# Altium PCB FRONT.PcbDoc (part 4 of 5)
Units mm, origin at the board's own origin, x right, y up, seen from the top; angles counter-clockwise.
Board outline 100 x 68 mm, 4 copper layers (Top Layer, Layer 1, Layer 2, Bottom Layer), stack 1.484 mm thick; 322 components, 276 nets, 1438 pads, 1119 vias.
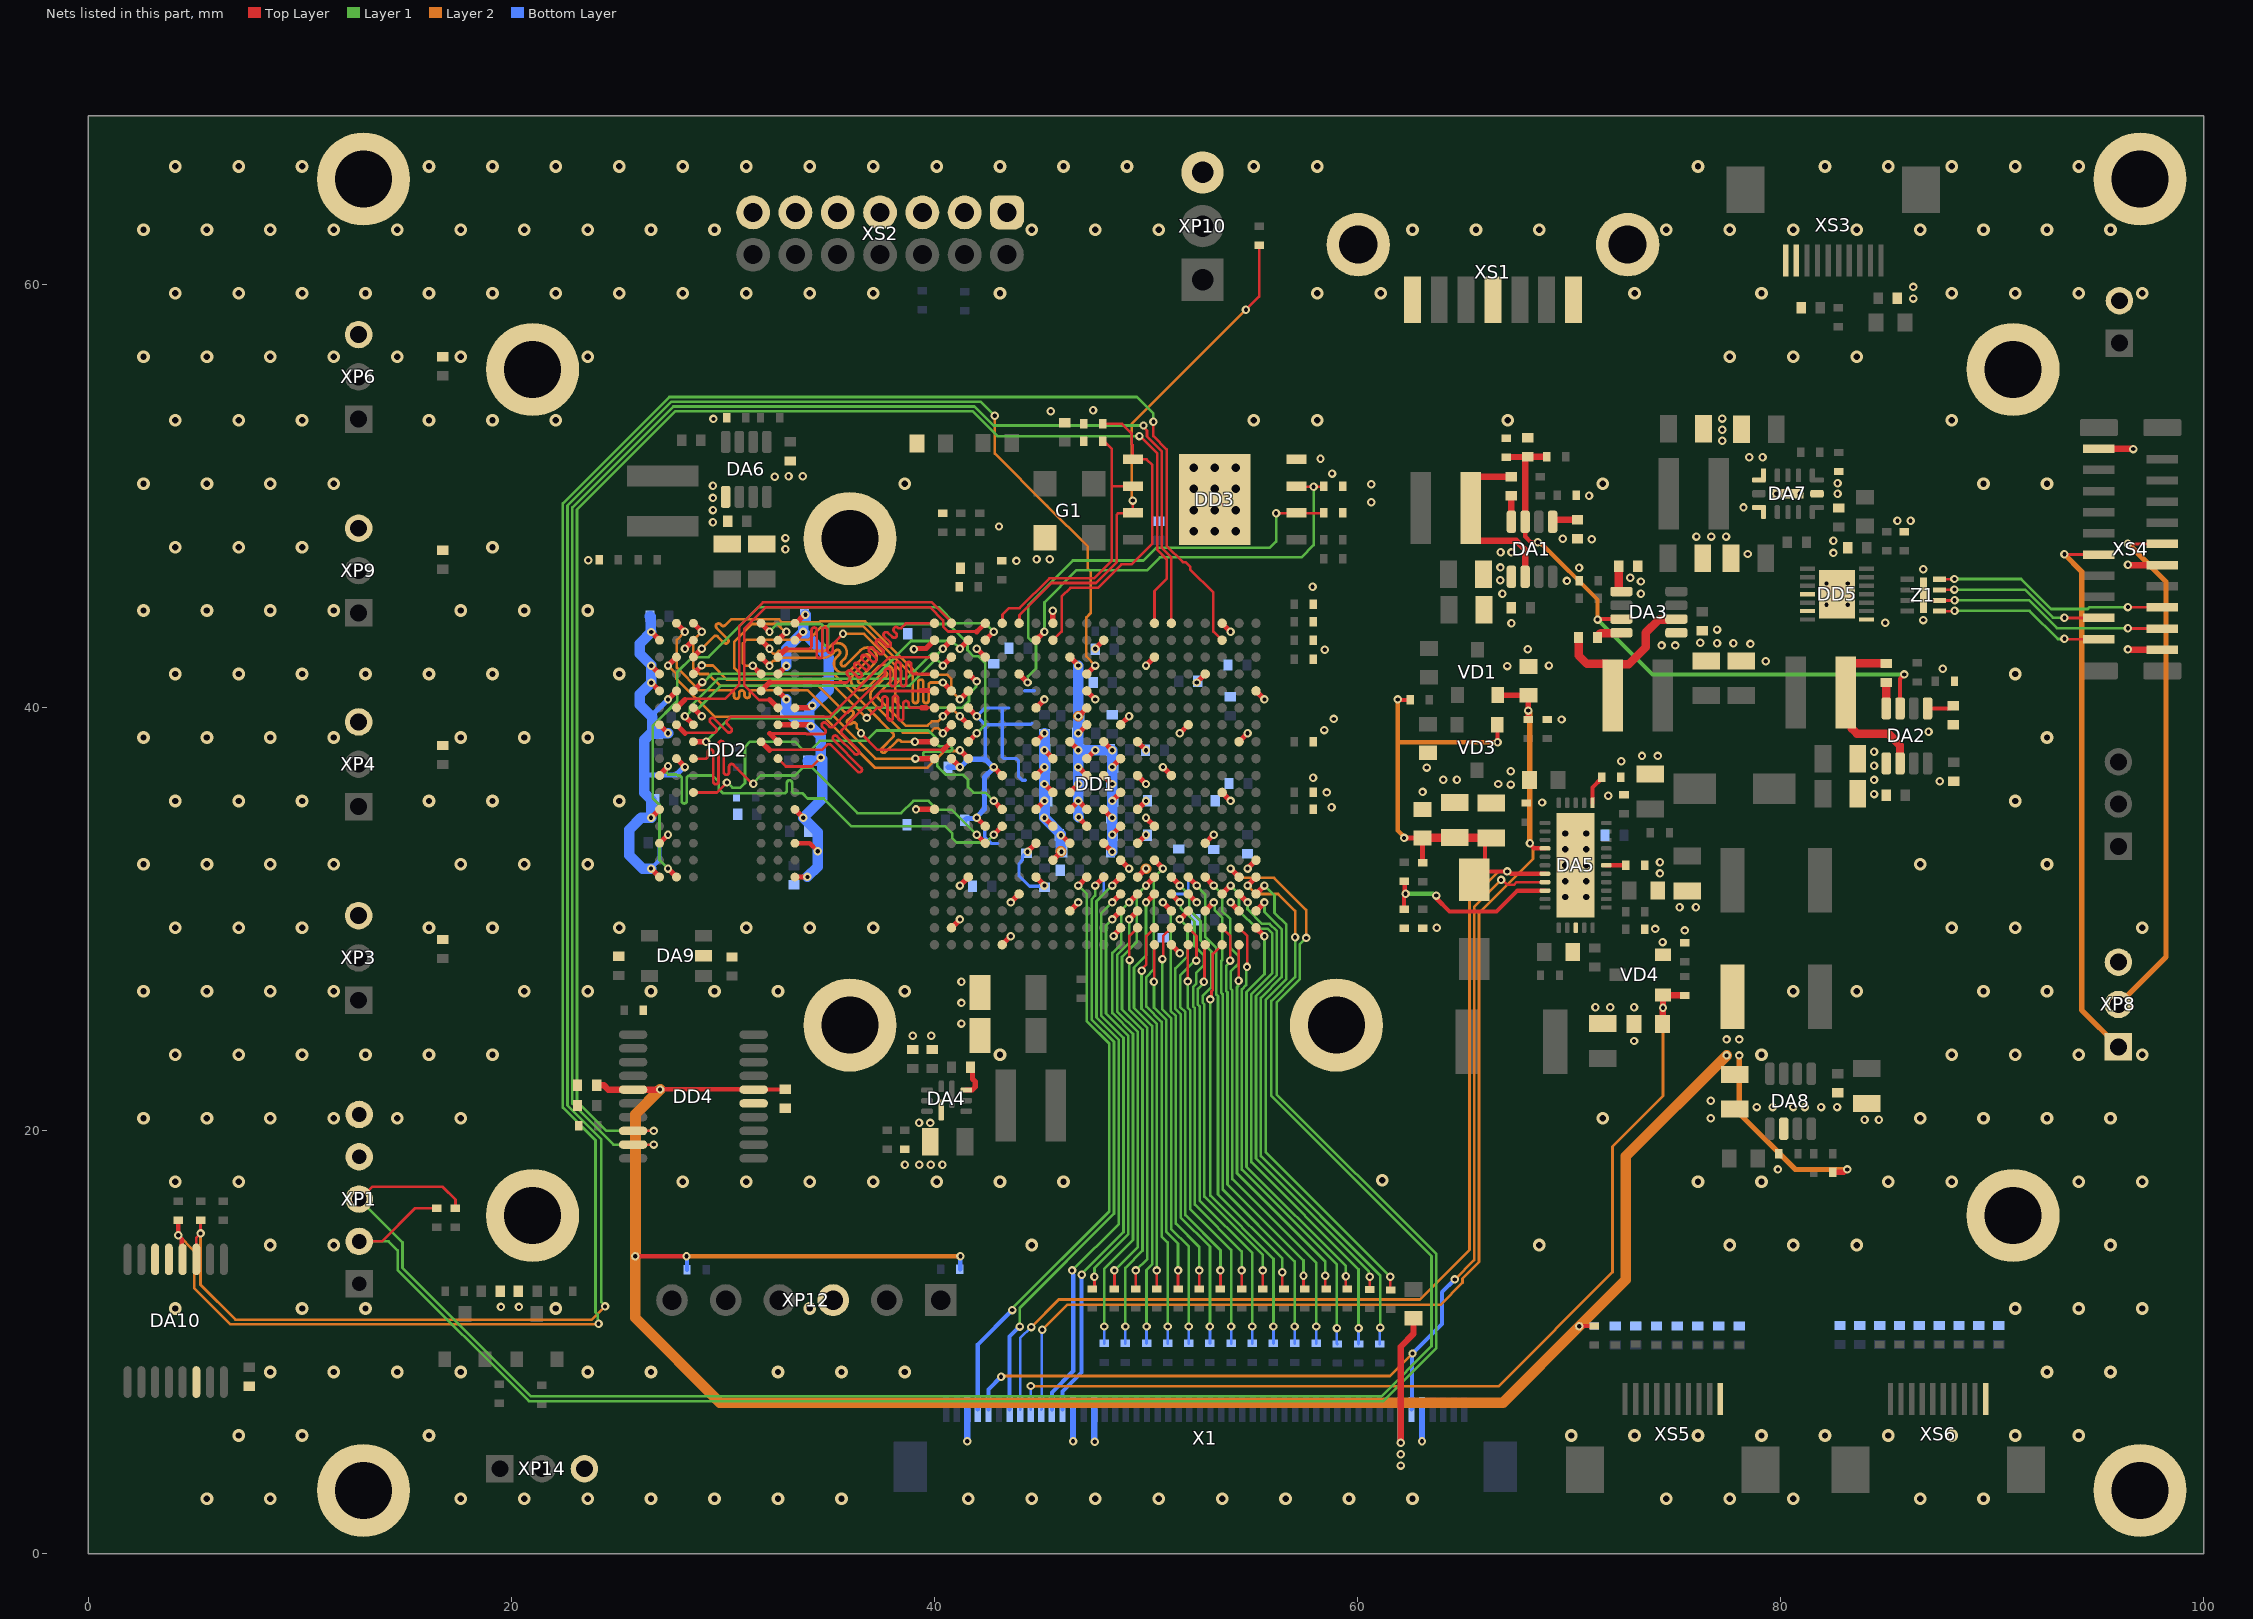
[diagram p5: the nets of this part, all layers, seen from the top]

## Via types
v1: diameter 0.4, hole 0.2, Top Layer to Bottom Layer, tented both sides, 828 vias
v2: diameter 0.6, hole 0.3, Top Layer to Bottom Layer, tented both sides, 265 vias
v3: diameter 0.8, hole 0.4, Top Layer to Bottom Layer, 12 vias
v4: diameter 0.5, hole 0.3, Top Layer to Bottom Layer, 10 vias
v5: diameter 0.5, hole 0.2, Top Layer to Bottom Layer, 4 vias

## Nets (pads, with @x,y where several pads share a name; then routed paths per layer and width w, separated by ;. In a path a pad name is that pad's centre, name@x,y a point inside that pad or via, vN(x,y) a via of type N, cw(c..) or ccw(c..) an arc to the next point about the centre after c; other vN are vias at no path point) (continued)
DDR_D1: DD1.B3 DD2.E3 | length 14.3
  Top Layer w0.25: DD2.E3@28.6,40.8 v1(29.019,41.219) ; v1(41.2,42.8) DD1.B3@41.6,43.2
  Layer 1 w0.125: v1(29.019,41.219) 29.093,41.219 29.487,41.613 37.35,41.613 38.9,43.162 40.838,43.162 v1(41.2,42.8)
DDR_D2: DD1.A2 DD2.F2 | length 17.7
  Top Layer w0.125: DD2.F2@27.8,40 28.227,40.427 30.103,40.427 30.775,41.1 30.775,43.875 31.892,44.992 39.874,44.992 40.8,44.066 DD1.A2@40.8,44
  Top Layer w0.25: DD2.F2@27.8,40 28.2,40.4
DDR_D3: DD1.A4 DD2.F8 | length 17.4
  Top Layer w0.125: 32.227,40.372 31.701,40.372 31,41.073 31,43.727 32.033,44.76 39.788,44.76 40.412,44.136 40.412,43.839 40.644,43.608 42.008,43.608
  Top Layer w0.25: 32.2,40.4 DD2.F8@32.6,40 ; 42,43.6 DD1.A4@42.4,44
DDR_D4: DD1.D3 DD2.H3 | length 15.5
  Top Layer w0.25: DD2.H3@28.6,38.4 v1(29.2,38.4) ; DD1.D3@41.6,41.6 41.625,41.6 41.975,41.25 v1(42,41.25)
  Layer 1 w0.125: v1(29.2,38.4) 30.318,39.518 35.093,39.518 35.575,40 41.313,40 41.63,40.317 41.63,40.659 41.961,40.991 41.961,41.211 v1(42,41.25)
DDR_D5: DD1.D1 DD2.H8 | length 14.7
  Top Layer w0.125: 32.213,38.787 33.926,38.787 33.95,38.763 34.594,38.763 34.734,38.763 ccw(c34.734,38.888) 34.822,38.976 34.701,39.097 cw(c34.789,39.186) 34.701,39.274 cw(c34.789,39.186) 34.878,39.274 35.038,39.114 ccw(c35.126,39.203) 35.214,39.114 35.871,39.771 37.032,40.932 37.621,41.521 ccw(c37.532,41.609) 37.657,41.609 37.657,41.739 cw(c37.782,41.739) 37.907,41.739 37.907,41.15 ccw(c38.032,41.15) 38.157,41.15 38.157,42.05 cw(c38.282,42.05) 38.407,42.05 38.407,41.15 ccw(c38.532,41.15) 38.657,41.15 38.657,42.05 cw(c38.782,42.05) 38.907,42.05 38.907,41.725 ccw(c39.032,41.725) 39.032,41.6 39.378,41.6 39.4,41.6 DD1.D1@40,41.6
  Top Layer w0.25: 32.213,38.787 DD2.H8@32.6,38.4
DDR_D6: DD1.C1 DD2.G2 | length 16.3
  Top Layer w0.125: DD2.G2@27.8,39.2 28.173,38.827 29.627,38.827 29.672,38.872 ccw(c29.583,38.96) 29.672,39.048 29.405,39.315 cw(c29.493,39.404) 29.405,39.492 cw(c29.493,39.404) 29.582,39.492 30.206,38.868 ccw(c30.294,38.956) 30.383,38.868 ccw(c30.294,38.956) 30.383,39.044 30.202,39.225 cw(c30.29,39.314) 30.202,39.402 30.388,39.587 35.063,39.587 37.875,42.4 DD1.C1@40,42.4
  Top Layer w0.25: DD2.G2@27.8,39.2 28.2,38.8
DDR_D7: DD1.E1 DD2.H7 | length 17.1
  Top Layer w0.125: DD2.H7@31.8,38.4 32.173,38.027 34.523,38.027 34.696,38.027 34.919,38.251 cw(c35.007,38.162) 35.096,38.251 36.357,36.99 ccw(c36.445,37.078) 36.534,36.99 ccw(c36.445,37.078) 36.534,37.167 35.222,38.478 cw(c35.311,38.566) 35.222,38.655 cw(c35.311,38.566) 35.399,38.655 36.221,37.832 ccw(c36.31,37.921) 36.398,37.832 ccw(c36.31,37.921) 36.398,38.009 35.626,38.781 cw(c35.715,38.869) 35.626,38.958 36.109,39.441 37.468,40.8 DD1.E1@40,40.8
  Top Layer w0.25: DD2.H7@31.8,38.4 32.2,38 ; 39.375,40.825 DD1.E1@39.975,40.825
DDR_D8: DD1.E2 DD2.D7 | length 17.5
  Top Layer w0.25: v1(31.409,41.991) DD2.D7@31.8,41.6 ; v1(40.4,41.2) DD1.E2@40.8,40.8
  Layer 2 w0.125: v1(31.409,41.991) 31.049,41.991 30.935,42.105 30.935,43.05 31.112,43.228 34.055,43.228 34.69,43.863 36.631,43.863 38.412,42.081 38.938,41.555 cw(c38.85,41.466) 38.975,41.466 38.975,40.35 ccw(c39.1,40.35) 39.225,40.35 39.225,41.212 cw(c39.35,41.212) 39.475,41.212 39.475,40.35 ccw(c39.6,40.35) 39.725,40.35 39.725,41.075 cw(c39.85,41.075) 39.85,41.2 v1(40.4,41.2)
DDR_D9: DD1.E3 DD2.C3 | length 17.5
  Top Layer w0.25: DD2.C3@28.6,42.4 v1(29,42.8) ; v1(41.2,40.4) DD1.E3@41.6,40.8
  Layer 2 w0.125: v1(29,42.8) 29.575,43.375 cw(c29.663,43.286) 29.751,43.375 30.048,43.078 ccw(c30.136,43.166) 30.225,43.078 ccw(c30.136,43.166) 30.225,43.255 29.702,43.777 cw(c29.79,43.866) 29.702,43.954 cw(c29.79,43.866) 29.879,43.954 29.928,43.905 ccw(c30.016,43.993) 30.105,43.905 30.388,44.188 32.648,44.188 32.801,44.035 34.544,44.035 34.597,44.088 36.724,44.088 39.249,41.562 40.613,41.562 40.8,41.375 40.8,40.8 v1(41.2,40.4)
DDR_D10: DD1.G3 DD2.C8 | length 18
  Top Layer w0.125: DD2.C8@32.6,42.4 33,42.8 34.063,42.8 ccw(c34.063,42.925) 34.188,42.925 34.188,43.672 cw(c34.313,43.672) 34.438,43.672 34.438,42.469 ccw(c34.563,42.469) 34.688,42.469 34.688,43.672 cw(c34.813,43.672) 34.938,43.672 34.938,42.719 ccw(c35.063,42.719) 35.188,42.719 35.188,42.961 cw(c35.313,42.961) 35.224,43.049 35.525,43.35 v1(35.675,43.5)
  Top Layer w0.25: DD2.C8@32.6,42.4 33,42.8 ; v1(41.2,39.6) DD1.G3@41.6,39.2
  Layer 2 w0.125: v1(35.675,43.5) 36.675,43.5 38.425,41.75 38.425,41.387 38.15,41.112 38.15,40.3 38.45,40 40.8,40 v1(41.2,39.6)
DDR_D11: DD1.H3 DD2.A7 | length 17.7
  Top Layer w0.25: DD2.A7@31.8,44 v1(32.2,43.6) ; DD1.H3@41.6,38.4 v1(42,38.8)
  Layer 1 w0.125: v1(32.2,43.6) 32.563,43.963 33.787,43.963 34.599,43.963 cw(c34.599,43.838) 34.724,43.838 34.724,43.075 ccw(c34.849,43.075) 34.974,43.075 34.974,43.838 cw(c35.099,43.838) 35.099,43.963 35.38,43.963 40.669,43.963 41.563,43.069 41.563,42.725 41.85,42.437 42.085,42.437 42.392,42.13 42.392,39.193 v1(42,38.8)
DDR_D12: DD1.J3 DD2.C2 | length 17.4
  Top Layer w0.25: v1(27.4,42) DD2.C2@27.8,42.4 ; v1(41.2,38) DD1.J3@41.6,37.6
  Layer 2 w0.125: v1(27.4,42) 27.8,41.6 27.8,41.375 29.588,39.587 34.763,39.587 37.175,37.175 39.677,37.175 40.465,37.962 41.163,37.962 v1(41.2,38)
DDR_D13: DD1.H2 DD2.A3 | length 18
  Top Layer w0.125: v1(36.525,38.8) 37.313,38.012 40.412,38.012 DD1.H2@40.8,38.4
  Top Layer w0.25: DD2.A3@28.6,44 v1(29,43.6) ; 40.4,38 DD1.H2@40.8,38.4
  Layer 2 w0.125: v1(29,43.6) 28.6,43.2 28.6,41.887 28.887,41.6 29.3,41.6 29.85,41.05 34.351,41.05 34.5,41.05 35.745,39.805 ccw(c35.833,39.894) 35.922,39.805 35.961,39.844 cw(c36.049,39.756) 36.137,39.844 cw(c36.049,39.756) 36.137,39.668 35.901,39.431 ccw(c35.989,39.342) 35.901,39.254 ccw(c35.989,39.342) 36.077,39.254 36.098,39.275 cw(c36.187,39.187) 36.275,39.275 36.319,39.231 36.319,39.08 36.525,38.874 v1(36.525,38.8)
DDR_D14: DD1.H1 DD2.B8 | length 17.5
  Top Layer w0.25: DD2.B8@32.6,43.2 v1(33,43.6) ; v1(39.075,38.4) DD1.H1@40,38.4
  Layer 2 w0.125: v1(33,43.6) 32.926,43.6 32.716,43.81 32.708,43.81 32.555,43.963 31.366,43.963 30.535,43.132 30.535,41.885 30.82,41.6 35.238,41.6 36.753,40.085 36.797,40.04 38.04,38.798 cw(c37.952,38.709) 38.04,38.621 37.509,38.09 ccw(c37.597,38.002) 37.509,37.913 ccw(c37.597,38.002) 37.686,37.913 38.217,38.444 cw(c38.305,38.356) 38.393,38.444 38.438,38.4 v1(39.075,38.4)
DDR_D15: DD1.J1 DD2.A2 | length 17.5
  Top Layer w0.25: DD2.A2@27.8,44 v1(28.2,43.6) ; v1(39.1,37.6) DD1.J1@40,37.6
  Layer 2 w0.125: v1(28.2,43.6) 27.816,43.216 27.816,41.909 28.9,40.825 29.217,40.825 30.393,40.825 cw(c30.393,40.7) 30.518,40.7 30.518,40.558 ccw(c30.643,40.558) 30.768,40.558 30.768,40.7 cw(c30.893,40.7) 31.018,40.7 31.018,40.593 ccw(c31.143,40.593) 31.268,40.593 31.268,40.7 cw(c31.393,40.7) 31.393,40.825 31.456,40.825 34.011,40.825 35.79,39.046 35.79,39.022 37.212,37.6 v1(39.1,37.6)
DDR_DM0: DD1.A1 DD2.E7 | length 16.5
  Top Layer w0.125: DD2.E7@31.8,40.8 32.2,41.2 35.85,41.2 35.881,41.231 35.967,41.317 ccw(c35.878,41.405) 35.964,41.496 35.894,41.562 cw(c35.98,41.652) 35.889,41.738 cw(c35.98,41.652) 36.066,41.743 36.354,41.472 ccw(c36.44,41.563) 36.531,41.477 ccw(c36.44,41.563) 36.526,41.654 36.238,41.925 cw(c36.323,42.016) 36.232,42.102 cw(c36.323,42.016) 36.409,42.107 36.697,41.835 ccw(c36.783,41.926) 36.874,41.841 ccw(c36.783,41.926) 36.869,42.017 36.581,42.289 cw(c36.666,42.38) 36.576,42.466 cw(c36.666,42.38) 36.752,42.471 37.04,42.199 ccw(c37.126,42.29) 37.217,42.204 ccw(c37.126,42.29) 37.212,42.381 36.924,42.653 cw(c37.01,42.744) 36.919,42.829 cw(c37.01,42.744) 37.095,42.834 37.383,42.563 ccw(c37.469,42.654) 37.56,42.568 ccw(c37.469,42.654) 37.555,42.745 37.267,43.016 cw(c37.353,43.107) 37.262,43.193 cw(c37.353,43.107) 37.438,43.198 37.726,42.926 ccw(c37.812,43.017) 37.903,42.932 ccw(c37.812,43.017) 37.898,43.108 37.623,43.367 cw(c37.709,43.458) 37.618,43.544 cw(c37.709,43.458) 37.795,43.549 38.008,43.348 ccw(c38.094,43.439) 38.185,43.353 ccw(c38.094,43.439) 38.18,43.53 38.097,43.608 cw(c38.183,43.699) 38.092,43.785 cw(c38.183,43.699) 38.268,43.79 ccw(c38.354,43.881) 38.443,43.793 38.618,43.968 38.65,44 DD1.A1@40,44
  Top Layer w0.25: DD2.E7@31.825,40.825 32.225,41.225
DDR_DM1: DD1.F1 DD2.D3 | length 17.6
  Top Layer w0.125: v1(36.8,39.525) 37.275,40 37.34,40 37.403,40 ccw(c37.403,40.125) 37.528,40.125 37.528,40.416 cw(c37.653,40.416) 37.778,40.416 37.778,39.529 ccw(c37.903,39.529) 38.028,39.529 38.028,40.45 cw(c38.153,40.45) 38.278,40.45 38.278,39.529 ccw(c38.403,39.529) 38.528,39.529 38.528,40.199 cw(c38.653,40.199) 38.778,40.199 38.778,40.125 ccw(c38.903,40.125) 38.903,40 39.625,40 DD1.F1@40,40
  Top Layer w0.25: DD2.D3@28.6,41.6 28.6,41.606 28.994,42 v1(28.994,42.006) ; 39.4,40 39.625,40
  Layer 2 w0.125: v1(28.994,42.006) 29,42 29.525,42 30.2,41.325 34.975,41.325 36.775,39.525 v1(36.8,39.525)
DDR_DQS0_N: DD1.B2 DD2.G3 | length 14.8
  Top Layer w0.25: v1(28.2,39.6) DD2.G3@28.6,39.2 ; v1(40.4,42.8) DD1.B2@40.8,43.2
  Layer 1 w0.125: v1(28.2,39.6) 28.231,39.6 28.437,39.807 28.437,40.045 29.767,41.375 38.688,41.375 39.875,42.562 40.163,42.562 v1(40.4,42.8)
DDR_DQS0_P: DD1.C2 DD2.F3 | length 14.3
  Top Layer w0.25: DD2.F3@28.6,40 v1(29,39.6) ; v1(40.4,42) DD1.C2@40.8,42.4
  Layer 1 w0.125: v1(29,39.6) 28.969,39.6 28.763,39.807 28.763,39.911 29.902,41.05 38.822,41.05 40.01,42.237 40.163,42.237 v1(40.4,42)
DDR_DQS1_N: DD1.F2 DD2.B7 | length 17.4
  Top Layer w0.25: DD2.B7@31.8,43.2 v1(32.2,42.8) ; v1(40.4,39.6) DD1.F2@40.8,40
  Layer 2 w0.125: v1(32.2,42.8) 32.2,42.751 32.398,42.553 32.501,42.553 32.636,42.687 34.55,42.687 34.705,42.687 ccw(c34.706,43.016) 34.937,42.783 35.09,42.936 cw(c35.408,42.618) 35.726,42.936 cw(c35.408,42.618) 35.726,42.299 ; 35.726,42.299 35.61,42.183 ccw(c35.698,42.094) 35.786,42.005 36.5,42.72 cw(c36.819,42.402) 37.137,42.72 cw(c36.819,42.402) 37.137,42.084 ; 37.136,42.083 36.423,41.369 ccw(c36.511,41.281) 36.599,41.192 37.314,41.907 cw(c37.632,41.589) 37.894,41.954 37.902,41.954 37.95,41.907 ; 37.949,41.27 37.328,40.649 ccw(c37.417,40.56) 37.328,40.472 38.637,39.162 39.673,39.162 39.873,39.362 39.966,39.362 40.163,39.362 v1(40.4,39.6) ; 37.95,41.27 ccw(c37.632,41.589) 37.998,41.851 37.998,41.859 37.95,41.906
DDR_DQS1_P: DD1.G2 DD2.C7 | length 17.4
  Top Layer w0.25: DD2.C7@31.8,42.4 31.8,42.391 32.2,41.991 v1(32.2,41.982) ; v1(40.4,38.8) DD1.G2@40.8,39.2
  Layer 2 w0.125: v1(32.2,41.982) 32.2,42.031 32.398,42.228 32.636,42.228 32.77,42.362 34.476,42.362 34.705,42.362 ccw(c34.706,43.016) 35.167,42.553 35.32,42.706 cw(c35.408,42.618) 35.497,42.706 cw(c35.408,42.618) 35.497,42.53 35.38,42.412 ccw(c35.698,42.094) 35.379,41.777 ; 35.381,41.775 ccw(c35.698,42.094) 36.016,41.776 36.73,42.49 cw(c36.819,42.402) 36.907,42.49 cw(c36.819,42.402) 36.907,42.314 36.193,41.599 ccw(c36.511,41.281) 36.192,40.963 ; 36.194,40.962 ccw(c36.511,41.281) 36.829,40.963 ; 36.83,40.964 37.543,41.677 cw(c37.632,41.589) 37.721,41.501 37.098,40.878 ccw(c37.417,40.56) 37.099,40.241 ; 37.099,40.241 38.503,38.837 39.441,38.837 39.808,38.837 40.008,39.037 40.163,39.037 v1(40.4,38.8)
DDR_ODT: DD1.N5 DD2.K1 | length 22.3
  Top Layer w0.25: DD2.K1@27,36.8 27,36.825 27.4,37.225 v1(27.4,37.25) ; v1(42.8,34) DD1.N5@43.2,34.4
  Layer 1 w0.125: v1(27.4,37.25) 27.347,37.197 27.347,37.058 27.328,37.039 27.328,36.936 27.414,36.85 27.606,36.85 27.8,36.85 27.85,36.8 27.919,36.8 cw(c27.919,36.675) 28.044,36.675 28.044,35.603 ccw(c28.169,35.603) 28.294,35.603 28.294,36.675 cw(c28.419,36.675) 28.419,36.8 28.819,36.8 29.505,36.8 29.8,36.505 29.8,36.152 29.989,35.963 32.33,35.963 32.893,35.963 ccw(c32.893,36.088) 33.018,36.088 33.018,36.45 cw(c33.143,36.45) 33.268,36.45 33.268,36.088 ccw(c33.393,36.088) 33.393,35.963 33.75,35.963 34,35.712 34.76,35.712 36.072,34.4 40.513,34.4 40.838,34.075 40.838,33.85 41.05,33.637 42.437,33.637 v1(42.8,34)
DDR_RAS#: DD1.P4 DD2.J3 | length 22.2
  Top Layer w0.125: DD2.J3@28.6,37.6 29.163,37.6 ccw(c29.163,37.725) 29.288,37.725 29.288,37.912 cw(c29.413,37.912) 29.538,37.912 29.538,36.518 ccw(c29.663,36.518) 29.788,36.518 29.788,38.306 cw(c29.913,38.306) 30.038,38.306 30.038,36.959 ccw(c30.163,36.959) 30.288,36.959 30.288,37.221 cw(c30.413,37.221) 30.501,37.309 30.671,37.14 31.4,36.41 v1(31.441,36.41)
  Top Layer w0.25: v1(42,34) DD1.P4@42.4,33.6
  Layer 1 w0.125: v1(31.441,36.41) 31.441,36.457 31.784,36.8 33.4,36.8 33.763,37.162 34.221,37.162 36.359,35.025 38.425,35.025 39,35.6 39.725,35.6 40.134,35.191 40.809,35.191 v1(42,34)
DDR_RESET#: DD1.B4 DD2.T2 | length 27.9
  Top Layer w0.25: v1(27.4,32.4) DD2.T2@27.8,32 ; DD1.B4@42.4,43.2 v1(42.8,43.6)
  Layer 1 w0.125: v1(27.4,32.4) 27,32.8 27,35.418 26.675,35.743 26.675,39.15 27.837,40.312 27.837,41.687 28.55,42.4 29.325,42.4 31.685,44.76 40.206,44.76 40.966,44 42.4,44 v1(42.8,43.6)
DDR_WE#: DD1.M5 DD2.L3 | length 22.2
  Top Layer w0.125: DD2.L3@28.6,36 29.713,36 v1(30.184,36.471)
  Top Layer w0.25: v1(42.8,35.6) DD1.M5@43.2,35.2
  Layer 1 w0.125: v1(30.184,36.471) 30.204,36.471 30.45,36.225 30.821,36.225 31.037,36.442 31.037,38.15 31.287,38.4 33.4,38.4 33.763,38.037 34.182,38.037 34.589,38.444 36.275,38.444 36.282,38.437 36.768,38.437 37.262,38.931 39.707,38.931 40.138,38.5 40.138,38.375 40.138,38.312 ccw(c40.263,38.312) 40.263,38.187 40.712,38.187 cw(c40.712,38.062) 40.712,37.937 39.588,37.937 ccw(c39.588,37.812) 39.588,37.687 40.013,37.687 cw(c40.013,37.562) 40.138,37.562 40.138,37.242 40.192,37.187 40.542,36.838 41.35,36.838 41.581,36.606 41.581,36.25 41.842,35.989 42.411,35.989 v1(42.8,35.6)
DIS_RS422A: XS4.2 Z1.5 | length 8.1
  Top Layer w0.125: Z1.5@87.445,44.575 v1@88.217,44.575 ; v1@93.425,43.25 XS4.2@95.05,43.25
  Layer 1 w0.125: v1(88.232,44.59) 91.782,44.59 93.116,43.256 93.414,43.256 v1(93.423,43.265)
DIS_RS422B: XS4.3 Z1.6 | length 11.1
  Top Layer w0.125: Z1.6@87.445,45.075 v1@88.217,45.075 ; v1@96.425,43.75 XS4.3@98.05,43.75
  Layer 1 w0.125: v1(88.232,45.09) 91.742,45.09 93.067,43.765 v1(96.423,43.765)
DIS_RS422Y: XS4.5 Z1.8 | length 11.2
  Top Layer w0.125: Z1.8@87.515,46.075 87.524,46.084 88.214,46.084 v1(88.223,46.092) ; v1@96.425,44.75 XS4.5@98.05,44.75
  Layer 1 w0.125: v1(88.223,46.092) 91.376,46.092 92.791,44.678 94.526,44.678 94.613,44.765 v1(96.423,44.765)
DIS_RS422Z: XS4.4 Z1.7 | length 8
  Top Layer w0.125: Z1.7@87.57,45.56 87.593,45.582 88.214,45.582 v1(88.222,45.59) ; v1@93.425,44.25 XS4.4@95.05,44.25
  Layer 1 w0.125: v1(88.222,45.59) 91.56,45.59 92.885,44.265 v1(93.423,44.265)
ENCODER_A: DD1.T19 R12.2 XP1.2 | length 89.3
  Top Layer w0.125: XP1.2@12.8,14.775 13.875,14.775 15.45,16.35 R12.2@16.475,16.35
  Top Layer w0.25: v1(54,32.4) DD1.T19@54.4,32
  Layer 1 w0.125: XP1.2@12.8,14.775 14.191,14.775 14.62,14.346 14.62,13.432 20.826,7.225 61.225,7.225 63.725,9.725 63.725,14.175 56.177,21.723 56.177,26.075 57.275,27.173 57.275,28.825 v1(57.575,29.125)
  Layer 2 w0.125: v1(54,32.4) 54.437,31.963 56.062,31.963 57.575,30.45 v1(57.575,29.125)
ENCODER_B: DD1.T20 R11.2 XP1.3 | length 89.2
  Top Layer w0.125: XP1.3@12.8,16.775 12.834,16.775 13.409,17.35 16.75,17.35 17.35,16.75 R11.2@17.35,16.35
  Top Layer w0.25: v1(54.8,31.6) DD1.T20@55.2,32
  Layer 1 w0.125: XP1.3@12.8,16.775 14.845,14.73 14.845,13.525 20.92,7.45 61.132,7.45 63.5,9.818 63.5,14.082 55.925,21.657 55.925,26.141 57.05,27.266 v1(57.05,29.15)
  Layer 2 w0.125: v1(54.8,31.6) 55.2,31.2 56.25,31.2 57.05,30.4 v1(57.05,29.15)
GND: C2.1 C3.1 C4.1 C5.1 C7.1 C8.1 C9.1 C10.1 C12.1 C13.1 C14.1 C15.1 C16.1 C18.2 C19.1 C20.2 C21.2 C22.2 C23.2 C24.2 C25.1 C26.1 C27.1 C28.1 C29.1 C30.2 C31.2 C32.2 C33.2 C34.2 C35.2 C36.2 C37.2 C38.2 C39.2 C40.2 C41.2 C42.2 C43.2 C44.2 C45.2 C46.1 C47.1 C48.1 C49.1 C50.1 C51.2 C52.2 C53.1 C54.1 C55.2 C56.2 C57.1 C59.1 C60.2 C61.1 C63.1 C64.2 C65.1 C66.1 C67.1 C68.1 C69.1 C70.1 C71.1 C72.1 C73.1 C74.1 C75.1 C76.1 C77.1 C78.1 C80.1 C81.1 C82.1 C83.1 C84.1 C85.1 C86.1 C87.1 C88.1 C89.1 C90.1 C91.1 C92.1 C93.1 C94.1 C95.1 C96.1 C97.1 C98.1 C99.1 C100.1 C101.1 C103.1 C104.1 C105.1 C106.1 C107.1 C108.1 C109.1 C111.2 C112.2 C113.1 C114.2 C115.1 C116.2 C117.2 C118.2 C119.2 C120.2 C121.2 C122.2 C123.2 C124.1 C125.2 C126.2 C127.2 C128.2 C129.2 C130.2 C131.2 C132.2 C133.2 C134.1 C135.1 C136.1 C137.1 C138.1 C139.1 C140.1 C141.1 C142.1 C143.1 DA1.1 DA2.1 DA3.1 DA4.4 DA5.3 DA5.33 DA6.1 DA7.1 DA7.6 DA7.11 DA7.13 DA8.2 DA9.2 DA10.6 DA10.13 DA10.14 DD1.A8 DD1.A18 DD1.B1 DD1.B11 DD1.C4 DD1.C9 DD1.C14 DD1.D17 DD1.E10 DD1.E20 DD1.F3 DD1.F7 DD1.F10 DD1.G10 DD1.G12 DD1.G16 DD1.H7 DD1.H9 DD1.H11 DD1.H13 DD1.H19 DD1.J2 DD1.J8 DD1.J10 DD1.J12 DD1.K5 DD1.K7 DD1.K10 DD1.K11 DD1.K13 DD1.K15 DD1.L8 DD1.L9 DD1.L12 DD1.L18 DD1.M1 DD1.M7 DD1.M9 DD1.M10 DD1.M11 DD1.M13 DD1.N4 DD1.N8 DD1.N10 DD1.N12 DD1.N14 DD1.P7 DD1.P9 DD1.P11 DD1.P13 DD1.P17 DD1.R8 DD1.R12 DD1.R20 DD1.T3 DD1.T7 DD1.T13 DD1.U6 DD1.U16 DD1.V9 DD1.V19 DD1.W2 DD1.W12 DD1.Y5 DD1.Y15 DD2.A9 DD2.B1 DD2.B3 DD2.B9 DD2.D1 DD2.D8 DD2.E1 DD2.E2 DD2.E8 DD2.F9 DD2.G1 DD2.G8 DD2.G9 DD2.J2 DD2.J8 DD2.M1 DD2.M9 DD2.P1 DD2.P9 DD2.T1 DD2.T9 DD3.4 DD3.9 DD4.15 DD5.4 DD5.6 DD5.8 DD5.15 G1.2 pad.1 R3.2 R5.2 R7.1 R8.2 R10.1 R13.1 R14.1 R15.1 R16.1 R19.1 R30.1 R32.1 R33.2 R39.1 R46.1 R48.2 R49.2 R51.1 R61.1 R67.2 R70.1 R72.2 R75.1 R76.1 R86.2 R87.2 R88.2 R89.2 R90.2 R91.2 R93.2 R94.2 R98.1 R101.2 R109.1 R120.1 R121.1 VD4.3 X1.5 X1.36 X1.38 X1.48 XP1.4 XP1.5 XP3.3 XP4.3 XP5.2 XP6.3 XP8.3 XP9.3 XP10.3 XP12.3 XP14.3 XS1.1 XS1.4 XS1.7 XS2.1 XS2.3 XS2.5 XS2.7 XS2.9 XS2.11 XS2.13 XS3.9 XS3.10 XS4.1 XS4.9 XS4.20 XS5.10 XS6.10 Z1.9 | length 147.3
  Top Layer w0.125: DD2.J8@32.6,37.6 32.972,37.227 34.202,37.227 v1(34.625,37.65)
  Top Layer w0.2: DD2.P9@33.4,33.6 34.1,33.6 v1(34.475,33.225)
  Top Layer w0.25: v1(26.6,32.4) DD2.T1@27,32 ; v1(26.6,34.8) DD2.M1@27,35.2 ; v1(26.613,41.187) DD2.E1@27,40.8 DD2.E1@27.013,40.787 ; v1(26.613,41.987) DD2.D1@27,41.6 DD2.D1@27.013,41.587 ; v1(26.613,43.587) DD2.B1@27,43.2 DD2.B1@27.013,43.187 ; DD2.P1@27,33.6 v1(27.4,34) ; DD2.G1@27,39.2 v1(27.4,38.8) ; v1(27.4,40.4) DD2.E2@27.8,40.8 ; DD2.J2@27.8,37.6 v1(28.2,37.2) ; v1(28.2,42.8) DD2.B3@28.6,43.2 ; DD2.G8@32.6,39.2 DD2.G9@33.4,39.2 34.034,39.2 34.109,39.125 v1(34.15,39.125) ; DD2.E8@32.6,40.8 v1(33,40.4) ; DD2.D8@32.6,41.6 32.609,41.6 32.991,41.982 v1(33,41.982) ; DD2.T9@33.4,32 33.404,32.004 33.989,32.004 v1(33.992,32.008) ; DD2.M9@33.4,35.2 v1(33.8,34.8) ; DD2.F9@33.4,40 34.072,40 34.178,40.105 v1(34.218,40.105) ; DD2.B9@33.4,43.2 33.4,43.202 33.787,43.589 v1(33.787,43.59) ; DD2.A9@33.4,44 33.446,44 33.814,44.368 33.871,44.368 v1(33.9,44.397) ; v1(39.025,42.775) 39.054,42.804 39.604,42.804 DD1.B1@40,43.2 ; v1(39.125,35.2) DD1.M1@40,35.2 ; DD1.W2@40.8,29.6 v1(41.2,30) ; DD1.J2@40.8,37.6 v1(41.2,37.2) ; v1(41.2,31.6) DD1.T3@41.6,32 ; DD1.F3@41.6,40 v1(42,39.6) ; v1(42,34.8) DD1.N4@42.4,34.4 ; v1(42,42.8) DD1.C4@42.4,42.4 ; v1(42.8,37.2) DD1.K5@43.2,36.8 ; DD1.Y5@43.2,28.8 v1(43.6,29.2) ; v1(43.6,30.8) DD1.U6@44,31.2 ; v1(44.4,33.2) DD1.P7@44.8,33.6 ; DD1.T7@44.8,32 v1(45.2,31.6) ; DD1.M7@44.8,35.2 v1(45.2,35.6) ; DD1.K7@44.8,36.8 v1(45.2,37.2) ; DD1.H7@44.8,38.4 v1(45.2,38.8) ; DD1.F7@44.8,40 v1(45.2,40.4) ; v1(45.2,34.8) DD1.N8@45.6,34.4 ; v1(45.2,36.4) DD1.L8@45.6,36 ; v1(45.2,38) DD1.J8@45.6,37.6 ; DD1.A8@45.596,44.004 v1@45.596,44.589 ; DD1.R8@45.6,32.8 v1(46,33.2) ; v1(45.976,33.976) 46,33.976 46.376,33.6 DD1.P9@46.4,33.6 ; DD1.V9@46.4,30.4 v1(46.8,30.8) ; DD1.M9@46.4,35.2 v1(46.8,35.6) DD1.M10@47.2,35.2 ; DD1.L9@46.4,36 v1(46.8,36.4) ; DD1.H9@46.4,38.4 v1(46.8,38) ; DD1.C9@46.4,42.4 v1(46.8,42) ; v1(46.8,37.2) DD1.K10@47.2,36.8 ; v1(46.8,38.8) DD1.G10@47.2,39.2 ; v1(46.8,39.6) DD1.F10@47.2,40 ; v1(46.824,34.824) 46.824,34.8 47.2,34.424 DD1.N10@47.2,34.4 ; DD1.J10@47.2,37.6 v1(47.6,38) ; DD1.E10@47.2,40.8 v1(47.6,40.4) ; v1(47.6,42.8) DD1.B11@48,43.2 ; DD1.P11@48,33.6 v1(48.4,33.2) ; DD1.M11@48,35.2 v1(48.4,34.8) ; DD1.K11@48,36.8 v1(48.4,36.4) ; DD1.H11@48,38.4 v1(48.4,38) ; v1(48.4,34) DD1.N12@48.8,34.4 ; v1(48.4,35.6) DD1.L12@48.8,36 ; v1(48.4,37.2) DD1.J12@48.8,37.6 ; v1(48.469,29.208) 48.469,29.239 48.8,29.569 DD1.W12@48.8,29.6 ; DD1.R12@48.8,32.8 v1(49.2,32.4) ; DD1.G12@48.8,39.2 v1(49.2,39.6) ; DD1.T13@49.6,32 v1(50,32.4) ; DD1.P13@49.6,33.6 v1(50,34) ; DD1.M13@49.6,35.2 v1(50,35.6) ; DD1.K13@49.6,36.8 v1(50,36.4) ; DD1.H13@49.6,38.4 v1(50,38) ; v1(50,34.8) DD1.N14@50.4,34.4 ; v1(50,42) DD1.C14@50.4,42.4 ; v1(50.8,37.2) DD1.K15@51.2,36.8 ; DD1.Y15@51.2,28.8 v1(51.6,28.4) ; v1(51.6,38.8) DD1.G16@52,39.2 ; DD1.U16@52,31.2 v1(52.4,30.8) ; v1(52.4,41.2) DD1.D17@52.8,41.6 ; DD1.P17@52.8,33.6 v1(53.2,34) ; DD1.L18@53.6,36 v1(54,35.6) ; DD1.A18@53.6,44 v1(54,43.6) ; v1(54,30.8) DD1.V19@54.4,30.4 ; DD1.H19@54.4,38.4 v1(54.8,38.8) ; v1(54.8,32.4) DD1.R20@55.2,32.8 ; DD1.E20@55.2,40.8 v1(55.6,40.4)
  Top Layer w0.3: XS4.20@95.05,52.25 v1@96.675,52.25 ; v1@96.425,42.75 XS4.1@98.05,42.75 ; v1@96.425,46.75 XS4.9@98.05,46.75
  Layer 2 w0.5: v1@45.976,33.224 v1(46,33.2)
  Bottom Layer w0.125: 47.95,31.15 48,31.2 48,32.175 ; 51.2,31.2 52,31.2 v1(52.4,30.8) ; 52.005,31.276 52.005,32.03
  Bottom Layer w0.15: v1(42,34.8) 42.375,34.425 42.375,33.895 42.676,33.593 42.998,33.593 ; v1(42.8,37.2) 42.4,37.6 42.4,39.2 ; 43.513,40 43.2,40 ; 44.26,40.809 44.732,40.809 ; 44.3,36.575 44.146,36.575 43.975,36.746 43.975,37.488 43.863,37.6 43.288,37.6 43.2,37.688 43.2,39.225 ; v1(44.4,33.2) 44.375,33.2 44.155,32.98 44.155,32.796 43.996,32.638 43.996,32.059 44.491,31.565 45.165,31.565 v1(45.2,31.6) ; 44.616,39.286 44.555,39.225 43.445,39.225 43.2,39.225 ; 52.005,32.03 52.1,32.125 ; 42.4,39.2 v1(42,39.6) 42.4,40 43.2,40 ; 42.4,39.2 43.175,39.2 43.2,39.225 ; 43.2,39.225 43.2,40
  Bottom Layer w0.2: v1(26.6,32.4) 27,32.8 27,33.6 v1(27.4,34)
  Bottom Layer w0.25: 26.525,36.825 27.784,36.825 28.159,37.2 v1(28.2,37.2) ; C80.1@26.605,39.605 v1(27.4,40.4) ; C86.1@40.634,37.185 40.642,37.192 41.192,37.192 v1(41.2,37.2) 41.241,37.2 41.616,37.575 42.384,37.575 42.759,37.2 v1(42.8,37.2) 42.8,37.159 42.369,36.728 42.369,35.209 42,34.841 v1(42,34.8) 41.971,34.771 41.509,34.771 C85.1@41.425,34.687
  Bottom Layer w0.3: v1(41.55,5.325) X1.48@41.55,6.825 ; v1(46.55,5.325) X1.38@46.55,6.825 ; X1.36@47.55,6.825 47.55,5.327 v1(47.575,5.302) ; v1(63.05,5.325) X1.5@63.05,6.825
  Bottom Layer w0.5: C71.1@26.549,44.326 26.559,44.326 26.579,44.306 26.579,43.621 v1(26.613,43.587) 26.063,43.037 26.063,42.559 26.613,42.009 v1(26.613,41.987) v1(26.613,41.187) 26.063,40.637 26.063,40.146 C80.1@26.605,39.605 ; v1(26.6,32.4) 26.201,32.4 25.569,33.032 C81.1@25.569,33.613 25.569,34.242 26.127,34.8 v1(26.6,34.8) 26.6,35.664 26.276,35.987 26.276,38.479 26.569,38.772 C69.1@26.896,38.772 ; C80.1@26.66,39.549 26.66,39.008 C69.1@26.733,38.936 ; C69.1@26.893,38.8 v1(27.4,38.8) ; v1(33,40.4) 33,39.868 33.293,39.575 34.075,39.575 ; v1(33,41.982) 33,42.8 v1@33.787,43.587 ; v1(33.9,44.397) 33.9,44.114 33.787,44.001 v1(33.787,43.59) v1@33.787,43.587 ; v1(33.992,32.008) 34.475,32.49 v1(34.475,33.225) 34.475,34.125 v1(33.8,34.8) 34.7,35.7 34.7,37.575 v1(34.625,37.65) ; C78.1@34.005,37.487 34.025,37.507 34.482,37.507 v1(34.625,37.65) ; v1(34.218,40.105) 34.218,40.081 34.075,39.938 34.075,39.575 ; v1@34.228,40.072 35,40.845 35,42.374 v1@33.787,43.587 ; v1(45.2,38.8) v1(45.2,37.2) v1(45.2,35.6) v1(45.2,34.8) 45.976,34.024 v1(45.976,33.976) 45.976,33.224 v1(46,33.2) ; v1(46.8,42) v1(46.8,39.6) v1(46.8,38.8) v1(46.8,38) ; v1(46.824,34.824) 46.8,34.849 v1(46.8,38) ; v1(48.4,33.2) v1(48.4,34.8) v1(48.4,36.4) v1(48.4,38) v1(46.8,38) ; 34.075,39.575 34.075,39.2 v1(34.15,39.125) 34.625,38.65 v1(34.625,37.65)
  other v1: 19.5,11.675 20.35,11.675 79.875,18.175 38.6,18.4 39.275,18.4 39.825,18.4 40.375,18.4 39.27,20.379 39.8,20.375 83.975,20.525 84.65,20.525 76.7,20.6 78.875,21.125 79.635,21.125 80.6,21.125 81.155,21.125 81.915,21.125 82.675,21.125 76.7,21.425 73.075,24.25 38.975,24.5 39.85,24.5 41.275,25.075 71.25,25.85 71.95,25.85 73.075,25.85 41.275,26.05 41.275,27.05 74.425,28.925 75.475,29.475 74.075,29.55 63.75,29.6 75.225,30.575 76,30.575 74.3,32.175 74.3,32.7 58.775,35.3 68.725,35.525 71.85,35.85 84.425,35.925 58.55,36 63.075,36.025 67.25,36.375 66.65,36.4 87.525,36.525 64.05,36.6 64.7,36.6 84.425,36.592 57.9,36.7 67.25,37 63.275,37.175 84.425,37.258 72.475,37.475 73.45,37.725 74.2,37.725 84.425,37.925 87,38.875 58.425,38.95 69.65,39.45 58.875,39.475 87.675,41.85 67.075,41.975 69.05,42 79.3,42.2 58.45,42.75 68.05,42.775 96.423,42.765 74.375,42.95 75.025,42.95 78.575,43.025 77,43.05 77.775,43.05 76.2,43.075 77,43.7 67.275,44 84.95,44.025 86.75,44.15 45.592,44.592 66.85,45.4 73.4,45.4 57.875,45.725 73.4,45.975 69.9,46 66.749,46.033 72.9,46.15 86.75,46.55 66.756,46.642 70.475,46.625 96.423,46.765 43.875,46.95 23.625,46.975 44.825,47.025 45.45,47.025 78.45,47.275 82.5,47.325 66.766,47.359 67.275,47.35 32.95,47.5 82.5,47.9 71.075,47.975 69.7,48 32.95,48.025 76.025,48.1 76.725,48.1 77.425,48.1 43.05,48.575 29.525,48.775 85.525,48.85 86.15,48.85 29.525,49.35 78.25,49.475 60.65,49.725 29.525,49.925 70.95,50.025 82.7,50.125 29.525,50.5 60.65,50.575 82.7,50.625 32.45,50.925 33.1,50.95 33.775,50.95 58.8,51.075 58.25,51.775 78.525,51.85 79.15,51.85 96.677,52.235 77.25,52.625 77.25,53.15 29.55,53.663 77.25,53.675 45.5,54.025 47.5,54.075 86.275,59.35 86.275,59.9
  other v2: 5.6,2.6 8.6,2.6 17.6,2.6 20.6,2.6 23.6,2.6 26.6,2.6 29.6,2.6 32.6,2.6 35.6,2.6 41.6,2.6 44.6,2.6 47.6,2.6 50.6,2.6 53.6,2.6 56.6,2.6 59.6,2.6 62.6,2.6 74.6,2.6 77.6,2.6 80.6,2.6 86.6,2.6 89.6,2.6 7.1,5.6 10.1,5.6 16.1,5.6 70.1,5.6 73.1,5.6 76.1,5.6 79.1,5.6 82.1,5.6 85.1,5.6 88.1,5.6 91.1,5.6 94.1,5.6 8.6,8.6 11.6,8.6 14.6,8.6 17.6,8.6 23.6,8.6 26.6,8.6 32.6,8.6 35.6,8.6 38.6,8.6 92.6,8.6 95.6,8.6 4.1,11.6 10.1,11.6 13.1,11.6 22.1,11.6 34.1,11.6 91.1,11.6 94.1,11.6 97.1,11.6 8.6,14.6 11.6,14.6 44.6,14.6 68.6,14.6 77.6,14.6 80.6,14.6 83.6,14.6 95.6,14.6 4.1,17.6 7.1,17.6 28.1,17.6 31.1,17.6 34.1,17.6 37.1,17.6 40.1,17.6 43.1,17.6 46.1,17.6 76.1,17.6 79.1,17.6 85.1,17.6 88.1,17.6 94.1,17.6 97.1,17.6 61.165,17.665 2.6,20.6 5.6,20.6 8.6,20.6 11.6,20.6 14.6,20.6 17.6,20.6 71.6,20.6 86.6,20.6 89.6,20.6 92.6,20.6 95.6,20.6 4.1,23.6 7.1,23.6 10.1,23.6 13.1,23.6 16.1,23.6 19.1,23.6 43.1,23.6 79.1,23.6 88.1,23.6 91.1,23.6 94.1,23.6 97.1,23.6 2.6,26.6 5.6,26.6 8.6,26.6 11.6,26.6 20.6,26.6 23.6,26.6 26.6,26.6 29.6,26.6 32.6,26.6 38.6,26.6 80.6,26.6 83.6,26.6 89.6,26.6 92.6,26.6 4.1,29.6 7.1,29.6 10.1,29.6 16.1,29.6 19.1,29.6 25.1,29.6 31.1,29.6 34.1,29.6 37.1,29.6 88.1,29.6 91.1,29.6 97.1,29.6 2.6,32.6 5.6,32.6 8.6,32.6 11.6,32.6 17.6,32.6 20.6,32.6 23.6,32.6 86.6,32.6 92.6,32.6 4.1,35.6 7.1,35.6 10.1,35.6 16.1,35.6 19.1,35.6 25.1,35.6 91.1,35.6 2.6,38.6 5.6,38.6 8.6,38.6 11.6,38.6 17.6,38.6 20.6,38.6 23.6,38.6 92.6,38.6 4.1,41.6 7.1,41.6 10.1,41.6 13.1,41.6 16.1,41.6 19.1,41.6 25.1,41.6 91.1,41.6 2.6,44.6 5.6,44.6 8.6,44.6 11.6,44.6 17.6,44.6 20.6,44.6 23.6,44.6 4.1,47.6 7.1,47.6 10.1,47.6 19.1,47.6 2.6,50.6 5.6,50.6 8.6,50.6 11.6,50.6 38.6,50.6 71.6,50.6 89.6,50.6 92.6,50.6 4.1,53.6 7.1,53.6 10.1,53.6 16.1,53.6 19.1,53.6 22.1,53.6 55.1,53.6 58.1,53.6 67.1,53.6 88.1,53.6 2.6,56.6 5.6,56.6 8.6,56.6 11.6,56.6 14.6,56.6 17.6,56.6 23.6,56.6 77.6,56.6 80.6,56.6 83.6,56.6 4.1,59.6 7.1,59.6 10.1,59.6 13.1,59.6 16.1,59.6 19.1,59.6 22.1,59.6 25.1,59.6 28.1,59.6 31.1,59.6 34.1,59.6 37.1,59.6 43.1,59.6 58.1,59.6 61.1,59.6 73.1,59.6 79.1,59.6 88.1,59.6 91.1,59.6 94.1,59.6 97.1,59.6 2.6,62.6 5.6,62.6 8.6,62.6 11.6,62.6 14.6,62.6 17.6,62.6 20.6,62.6 23.6,62.6 26.6,62.6 29.6,62.6 44.6,62.6 47.6,62.6 50.6,62.6 62.6,62.6 65.6,62.6 68.6,62.6 74.6,62.6 77.6,62.6 80.6,62.6 83.6,62.6 86.6,62.6 89.6,62.6 92.6,62.6 95.6,62.6 4.1,65.6 7.1,65.6 10.1,65.6 16.1,65.6 19.1,65.6 22.1,65.6 25.1,65.6 28.1,65.6 31.1,65.6 34.1,65.6 37.1,65.6 40.1,65.6 43.1,65.6 46.1,65.6 49.1,65.6 55.1,65.6 58.1,65.6 76.1,65.6 82.1,65.6 85.1,65.6 88.1,65.6 91.1,65.6 94.1,65.6
  other v3: 52.25,48.35 53.25,48.35 54.25,48.35 52.25,49.35 53.25,49.35 54.25,49.35 52.25,50.35 53.25,50.35 54.25,50.35 52.25,51.35 53.25,51.35 54.25,51.35
  other v4: 69.816,31.057 70.816,31.057 69.816,31.807 70.816,31.807 69.816,32.557 70.816,32.557 69.816,33.307 70.816,33.307 69.816,34.057 70.816,34.057
  other v5: 82.175,44.875 83.175,44.875 82.175,45.875 83.175,45.875
I2C_SCL: DA10.12 DD1.B18 R122.1 | length 106.5
  Top Layer w0.125: v1(50.35,53.525) 50.35,53.137 50.35,52.85 50.975,52.225 50.975,47.663 51.75,46.888 51.875,46.888 52.088,46.675 52.088,46.55 53.187,45.45 53.187,43.612 DD1.B18@53.6,43.2
  Top Layer w0.2: R122.1@4.25,15.775 4.25,15.05 4.416,14.884 4.416,13.959 DA10.12@4.45,13.925
  Layer 1 w0.125: v1(24.119,10.881) 24.083,10.917 24.083,11.308 23.975,11.416 23.975,19.557 22.425,21.107 22.425,49.659 27.466,54.7 49.575,54.7 50.35,53.925 v1(50.35,53.525)
  Layer 2 w0.125: v1(4.247,15.068) 5,14.315 5,12.575 6.725,10.85 24.088,10.85 v1(24.119,10.881)
I2C_SDA: DA10.11 DD1.D10 R123.1 | length 100
  Top Layer w0.125: DA10.11@5.1,13.925 5.1,14.95 v1(5.3,15.15) R123.1@5.3,15.775
  Top Layer w0.25: DD1.D10@47.2,41.6 v1(47.6,42)
  Layer 1 w0.125: v1(24.425,11.7) 24.425,11.736 24.25,11.911 24.25,19.6 22.65,21.2 22.65,49.566 27.56,54.475 42.182,54.475 v1(42.85,53.807)
  Layer 2 w0.125: v1(5.3,15.15) 5.3,12.725 6.95,11.075 23.8,11.075 v1(24.425,11.7) ; v1(42.85,53.807) 42.85,52.025 45.328,49.547 ; 45.329,49.547 47.25,47.626 47.25,46.575 47.388,46.437 47.388,44.481 47.182,44.276 47.182,42.418 v1(47.6,42)
LCD_AVDD: C54.2 C55.1 C56.1 DA5.28 R21.2 R25.1 VD2.1 VD3.2 X1.43 | length 68.7
  Top Layer w0.2: v1(61.9,40.4) 61.925,40.375 R21.2@62.5,40.375 ; VD2.1@65.525,31.875 VD2.1@65.916,32.266 ; C55.1@66.325,33.85 66.025,33.55 66.025,32.375 VD2.1@65.916,32.266 ; VD3.2@66.6,39.2 66.625,39.175 v1(66.625,38.375) ; v1@67.033,32.185 67.076,32.228 67.176,32.228 67.246,32.157 DA5.28@68.866,32.157 ; v1(67.083,32.266) VD2.1@65.916,32.266
  Top Layer w0.25: v1(62.2,33.85) C54.2@63.075,33.85 R25.1@63.075,32.675
  Top Layer w0.4: C54.2@63.075,33.85 C55.1@66.325,33.85
  Layer 2 w0.125: v1(44.575,10.725) 45.875,12.025 62.95,12.025 65.293,14.368 65.293,30.881 66.677,32.266 v1(67.083,32.266)
  Layer 2 w0.2: v1(61.9,40.4) 61.9,38.4 ; v1(62.2,33.85) 62.2,33.904 61.9,34.204 61.9,38.4 ; v1(66.625,38.375) 61.925,38.375 61.9,38.4
  Bottom Layer w0.125: X1.43@44.05,6.825 44.05,10.2 v1(44.575,10.725)
LCD_B0: DD1.Y18 R42.2 | length 20.3
  Top Layer w0.125: v1(53.041,26.216) 53.094,26.269 53.094,26.598 53.163,26.666 53.163,28.363 DD1.Y18@53.588,28.787
  Layer 1 w0.125: v1(53.041,26.216) 53.041,16.934 56.025,13.95 v1(56.025,10.75)
  Bottom Layer w0.125: R42.2@56.025,9.95 v1(56.025,10.75)
LCD_B1: DD1.T16 R41.2 | length 21.3
  Top Layer w0.125: v1(56.444,13.319) 56.444,12.606 R41.2@56.525,12.525
  Top Layer w0.25: DD1.T16@52,32 v1(52.4,31.6)
  Layer 1 w0.125: v1(52.4,31.6) 52.4,31.587 52.802,31.185 52.802,29.173 53.325,28.65 53.325,26.445 53.404,26.367 53.404,16.996 56.444,13.956 v1(56.444,13.319)
LCD_B2: DD1.V17 R40.2 | length 23
  Top Layer w0.25: DD1.V17@52.8,30.4 v1(53.2,30.8)
  Layer 1 w0.125: v1(53.2,30.8) 53.253,30.747 53.253,30.429 53.6,30.082 53.6,28.082 53.562,28.044 53.562,26.526 53.629,26.46 53.629,17.221 57.025,13.825 v1(57.025,10.75)
  Bottom Layer w0.125: R40.2@57.025,9.95 v1(57.025,10.75)
LCD_B3: DD1.W18 R38.2 | length 18.9
  Top Layer w0.125: DD1.W18@53.6,29.6 53.987,29.212 53.987,28.062 v1(53.975,28.05) ; v1(57.447,13.147) 57.447,12.578 R38.2@57.5,12.525
  Layer 1 w0.125: v1(53.975,28.05) 53.975,27.976 53.787,27.788 53.787,26.619 53.854,26.553 53.854,17.471 57.447,13.878 v1(57.447,13.147)
LCD_B4: DD1.T17 R37.2 | length 24.5
  Top Layer w0.25: DD1.T17@52.8,32 v1(53.2,31.6)
  Layer 1 w0.125: v1(53.2,31.6) 53.6,31.2 53.6,30.4 53.987,30.012 53.987,28.637 54.387,28.238 54.387,27.925 54.012,27.55 54.012,26.712 54.079,26.646 54.079,17.721 58.05,13.75 v1(58.05,10.75)
  Bottom Layer w0.125: R37.2@58.05,9.95 v1(58.05,10.75)
LCD_B5: DD1.Y19 R35.2 | length 18
  Top Layer w0.125: v1(54.375,27.102) 54.387,27.115 DD1.Y19@54.387,28.787 ; v1(58.475,13.15) 58.475,12.575 R35.2@58.525,12.525
  Layer 1 w0.125: v1(54.375,27.102) 54.349,27.076 54.349,26.83 54.304,26.784 54.304,17.996 58.475,13.825 v1(58.475,13.15)
LCD_B6: DD1.W19 R34.2 | length 21.8
  Top Layer w0.125: DD1.W19@54.4,29.6 54.787,29.212 54.787,27.762 v1(54.775,27.75)
  Layer 1 w0.125: v1(54.775,27.75) 54.738,27.712 54.738,26.9 54.529,26.691 54.529,18.171 59.025,13.675 v1(59.025,10.675)
  Bottom Layer w0.125: v1(59.025,10.675) 59.025,9.95 R34.2@59.05,9.925
LCD_B7: DD1.W20 R31.2 | length 19.6
  Top Layer w0.125: v1(59.45,13.125) 59.45,12.6 R31.2@59.525,12.525
  Top Layer w0.25: DD1.W20@55.2,29.6 v1(55.6,29.2)
  Layer 1 w0.125: v1(55.6,29.2) 55.6,27.407 54.754,26.561 54.754,18.296 59.45,13.6 v1(59.45,13.125)
LCD_DCLK: DD1.V12 R66.2 | length 19.1
  Top Layer w0.125: R66.2@47.562,12.662 v1(47.562,13.106)
  Top Layer w0.25: v1(48.4,30) DD1.V12@48.8,30.4
  Layer 1 w0.125: v1(47.562,13.106) 47.562,13.518 49.162,15.119 49.162,24.494 48.107,25.549 48.107,29.707 v1(48.4,30)
LCD_DCTRL: DA5.17 R49.1 | length 1.4
  Top Layer w0.2: DA5.17@71.116,35.507 71.116,36.241 71.55,36.675 R49.1@71.55,36.725
LCD_DE: DD1.V20 R24.2 | length 24.5
  Top Layer w0.25: DD1.V20@55.2,30.4 v1(55.6,30.8)
  Layer 1 w0.125: v1(55.6,30.8) 55.6,30.349 56.413,29.537 56.413,27.265 55.429,26.282 55.429,18.803 61.075,13.157 v1(61.075,10.7)
  Bottom Layer w0.125: R24.2@61.05,9.925 v1@61.05,10.675
LCD_DITHB: DD1.T10 X1.47 | length 28.5
  Top Layer w0.25: v1(46.8,31.6) DD1.T10@47.2,32
  Layer 1 w0.125: v1(43.675,11.525) 43.675,11.593 48.262,16.181 48.262,24.121 47.207,25.176 47.207,31.193 v1(46.8,31.6)
  Bottom Layer w0.2: X1.47@42.05,6.825 42.05,9.9 v1(43.675,11.525)
LCD_DVDD: L8.1 X1.7 | length 7.7
  Top Layer w0.3: v1(62.05,5.25) 62.05,9.8 62.65,10.4 L8.1@62.65,11.14
  Bottom Layer w0.3: v1(62.05,5.25) X1.7@62.05,6.825
  other v1: 62.05,4.175 62.05,4.713
LCD_EN: DA5.11 R48.1 | length 0.9
  Top Layer w0.2: DA5.11@71.766,32.557 72.668,32.557 R48.1@72.675,32.55
LCD_G0: DD1.W15 R56.2 | length 20.3
  Top Layer w0.125: v1(50.775,28.125) 50.812,28.162 50.812,29.212 DD1.W15@51.2,29.6
  Layer 1 w0.125: v1(50.775,28.125) 50.775,25.745 51.187,25.332 51.187,15.363 52.025,14.525 v1(52.025,10.75)
  Bottom Layer w0.125: R56.2@52.025,9.95 v1(52.025,10.75)
LCD_G1: DD1.V15 R55.2 | length 19.6
  Top Layer w0.125: R55.2@52.517,12.525 v1(52.517,13.4)
  Top Layer w0.25: v1(50.8,30.8) DD1.V15@51.2,30.4
  Layer 1 w0.125: v1(50.8,30.8) 51.162,30.437 51.162,25.675 51.412,25.426 51.412,15.613 52.517,14.508 52.517,13.474 v1(52.517,13.4)
LCD_G2: DD1.V16 R54.2 | length 21.7
  Top Layer w0.25: v1(51.6,30) DD1.V16@52,30.4
  Layer 1 w0.125: v1(51.6,30) 51.962,29.637 51.962,28.25 51.387,27.675 51.387,25.769 51.637,25.519 51.637,15.913 53.025,14.525 v1(53.025,10.75)
  Bottom Layer w0.125: R54.2@53.025,9.95 v1(53.025,10.75)
LCD_G3: DD1.W16 R53.2 | length 18.4
  Top Layer w0.125: DD1.W16@52,29.6 52.387,29.212 v1@52.387,28.062 ; R53.2@53.519,12.525 v1(53.519,13.4)
  Layer 1 w0.125: v1(52.375,28.05) 52.325,28.05 51.613,27.337 51.613,25.862 51.862,25.612 51.862,16.013 53.519,14.356 v1(53.519,13.4)
LCD_G4: DD1.Y16 R50.2 | length 19.7
  Top Layer w0.125: v1(51.975,27.065) 51.98,27.07 51.98,28.78 DD1.Y16@51.987,28.787
  Layer 1 w0.125: v1(51.975,27.065) 51.975,25.818 52.087,25.705 52.087,16.306 54.025,14.368 v1(54.025,10.75)
  Bottom Layer w0.125: R50.2@54.025,9.95 v1(54.025,10.75)
LCD_G5: DD1.U15 R47.2 | length 20.5
  Top Layer w0.125: R47.2@54.521,12.525 v1(54.521,13.4)
  Top Layer w0.25: DD1.U15@51.2,31.2 v1(51.6,30.8)
  Layer 1 w0.125: v1(51.6,30.8) 51.638,30.762 51.638,30.54 52.29,29.889 52.29,28.735 52.737,28.287 52.737,27.837 52.375,27.475 52.375,26.953 52.229,26.806 52.229,25.882 52.312,25.798 52.312,16.513 54.521,14.304 v1(54.521,13.4)
LCD_G6: DD1.Y17 R45.2 | length 20
  Top Layer w0.125: v1(52.737,27.05) 52.769,27.081 52.769,28.769 DD1.Y17@52.787,28.787
  Layer 1 w0.125: v1(52.737,27.05) 52.737,26.997 52.454,26.713 52.454,25.975 52.537,25.892 52.537,16.713 55.025,14.225 v1(55.025,10.75)
  Bottom Layer w0.125: R45.2@55.025,9.95 v1(55.025,10.75)
LCD_G7: DD1.T15 R44.2 | length 21.6
  Top Layer w0.125: R44.2@55.523,12.525 v1(55.523,13.4)
  Top Layer w0.25: DD1.T15@51.2,32 v1(51.6,31.6)
  Layer 1 w0.125: v1(51.6,31.6) 52.037,31.163 52.037,30.459 52.577,29.92 52.577,28.998 53.1,28.475 53.1,27.048 53.1,26.801 52.679,26.38 52.679,26.068 52.762,25.985 52.762,16.888 55.523,14.127 v1(55.523,13.4)
LCD_HSYNC: DD1.U18 R29.2 | length 25.9
  Top Layer w0.25: DD1.U18@53.6,31.2 v1(54,31.6)
  Layer 1 w0.125: v1(54,31.6) 54.4,31.2 54.4,30.4 55.237,29.563 55.75,29.563 55.962,29.35 55.962,27.452 54.979,26.468 54.979,18.521 60.05,13.45 v1(60.05,10.675)
  Bottom Layer w0.125: R29.2@60.05,9.925 v1(60.05,10.675)
LCD_L/R: DD1.U12 X1.39 | length 26.3
  Top Layer w0.25: v1(48.4,30.8) DD1.U12@48.8,31.2
  Layer 1 w0.125: v1(46.963,13.197) v1@46.967,13.2 ; v1@46.975,13.25 48.937,15.212 48.937,24.4 47.882,25.456 47.882,30.282 v1(48.4,30.8)
  Bottom Layer w0.2: X1.39@46.05,6.825 46.05,7.675 46.95,8.575 46.95,13.184 v1(46.963,13.197)
LCD_MODE: DD1.U20 R23.2 | length 23
  Top Layer w0.125: v1(61.55,13.1) 61.55,12.5 R23.2@61.575,12.475
  Top Layer w0.25: DD1.U20@55.2,31.2 v1(55.6,31.6)
  Layer 1 w0.125: v1(55.6,31.6) 56.075,31.125 56.075,30.312 56.638,29.75 56.638,27.172 55.654,26.188 55.654,18.996 v1(61.55,13.1)
LCD_OPI: DA5.30 R43.2 R46.2 | length 8.8
  Top Layer w0.2: R46.2@62.2,30.475 62.2,31.083 62.275,31.158 v1(62.275,31.213) ; v1@62.2,31.213 62.238,31.25 62.238,31.762 R43.2@62.2,31.8 ; v1(63.725,31.125) 63.725,31 64.35,30.375 66.575,30.375 67.557,31.357 DA5.30@68.866,31.357
  Layer 1 w0.2: v1(62.275,31.213) 63.583,31.213 63.671,31.125 v1(63.725,31.125)
LCD_R0: DD1.U13 R65.2 | length 22.7
  Top Layer w0.25: v1(49.2,30.8) DD1.U13@49.6,31.2
  Layer 1 w0.125: v1(48.025,10.75) 48.025,13.475 49.387,14.837 49.387,24.587 48.412,25.562 48.412,28.412 48.832,28.831 48.832,30.432 v1(49.2,30.8)
  Bottom Layer w0.125: R65.2@48.025,9.95 v1(48.025,10.75)
LCD_R1: DD1.V13 R64.2 | length 19.1
  Top Layer w0.125: R64.2@48.51,12.525 v1(48.51,13.4)
  Top Layer w0.25: v1(49.2,30) DD1.V13@49.6,30.4
  Layer 1 w0.125: v1(48.51,13.4) 49.612,14.503 49.612,24.68 48.637,25.655 48.637,28.319 49.2,28.881 v1(49.2,30)
LCD_R2: DD1.T14 R63.2 | length 23.4
  Top Layer w0.25: v1(50,31.6) DD1.T14@50.4,32
  Layer 1 w0.125: v1(49.025,10.75) 49.025,13.525 49.837,14.337 49.837,24.773 48.862,25.748 48.862,28.225 49.563,28.925 49.563,31.163 v1(50,31.6)
  Bottom Layer w0.125: R63.2@49.025,9.95 v1(49.025,10.75)
LCD_R3: DD1.W13 R62.2 | length 17.8
  Top Layer w0.125: v1(49.225,28.075) 49.212,28.088 49.212,29.212 DD1.W13@49.6,29.6 ; R62.2@49.512,12.525 v1(49.512,13.4)
  Layer 1 w0.125: v1(49.225,28.075) 49.209,28.059 49.209,25.72 50.062,24.866 50.062,13.951 v1(49.512,13.4)
LCD_R4: DD1.U14 R60.2 | length 22.1
  Top Layer w0.25: v1(50,30.8) DD1.U14@50.4,31.2
  Layer 1 w0.125: v1(50,30.8) 50,28.283 49.434,27.716 49.434,25.813 50.287,24.96 50.287,13.687 50.025,13.425 v1(50.025,10.75)
  Bottom Layer w0.125: R60.2@50.025,9.95 v1(50.025,10.75)
LCD_R5: DD1.W14 R59.2 | length 17.6
  Top Layer w0.125: v1(49.796,27.566) 49.796,27.641 50.012,27.857 50.012,29.212 DD1.W14@50.4,29.6 ; R59.2@50.513,12.525 v1(50.513,13.4)
  Layer 1 w0.125: v1(49.796,27.566) 49.787,27.558 49.787,25.778 50.512,25.053 50.512,13.401 v1(50.513,13.4)
LCD_R6: DD1.R14 R58.2 | length 23.8
  Top Layer w0.25: DD1.R14@50.4,32.8 v1(50.8,32.4)
  Layer 1 w0.125: v1(50.8,32.4) 50.363,31.963 50.363,27.62 50.012,27.27 50.012,25.871 50.737,25.146 50.737,15.013 51.025,14.725 v1(51.025,10.75)
  Bottom Layer w0.125: R58.2@51.025,9.95 v1(51.025,10.75)
LCD_R7: DD1.Y14 R57.2 | length 16.8
  Top Layer w0.125: v1(50.375,27.05) 50.387,27.062 50.387,28.787 DD1.Y14@50.4,28.8 ; R57.2@51.515,12.525 v1(51.515,13.4)
  Layer 1 w0.125: v1(50.375,27.05) 50.375,25.827 50.962,25.239 50.962,15.225 51.515,14.672 v1(51.515,13.4)
LCD_RESET: DD1.T11 X1.44 | length 27.9
  Top Layer w0.25: v1(47.6,31.6) DD1.T11@48,32
  Layer 1 w0.125: v1@44.038,10.751 44.038,11.638 48.487,16.087 48.487,24.214 47.432,25.27 47.432,30.95 47.6,31.118 v1(47.6,31.6)
  Bottom Layer w0.2: X1.44@43.55,6.825 43.55,10.275 44.021,10.746 v1(44.033,10.746)
LCD_U/D: DD1.T12 X1.40 | length 27.4
  Top Layer w0.25: v1(48.4,31.6) DD1.T12@48.8,32
  Layer 1 w0.125: v1(46.506,13.4) 48.712,15.607 48.712,24.307 47.657,25.363 47.657,30.857 v1(48.4,31.6)
  Bottom Layer w0.2: X1.40@45.55,6.825 45.55,7.633 46.563,8.646 46.563,13.201 46.544,13.22 46.544,13.362 v1(46.506,13.4)
LCD_VCOM: DA5.29 X1.6 X1.46 | length 50.7
  Top Layer w0.125: v1(66.787,31.863) 66.861,31.863 67.093,31.632 67.395,31.632 67.521,31.757 DA5.29@68.866,31.757
  Layer 2 w0.125: v1(43.15,8.375) 43.187,8.412 61.537,8.412 v1(62.6,9.475) ; v1(64.6,12.975) 65.518,13.893 65.518,30.593 v1(66.787,31.863)
  Bottom Layer w0.2: X1.46@42.55,6.825 42.55,7.775 v1(43.15,8.375) ; X1.6@62.55,6.825 62.575,6.85 62.575,9.45 64,10.875 64,12.375 v1(64.6,12.975)
LCD_VGH: C57.2 DA5.25 R22.1 VD1.3 X1.41 | length 56.5
  Top Layer w0.2: v1(68.15,33.6) 68.15,33.567 68.36,33.357 DA5.25@68.866,33.357
  Top Layer w0.25: VD1.3@66.625,40.6 C57.2@68.075,40.6 R22.1@68.075,39.45
  Layer 2 w0.125: v1(45.1,10.6) 46.275,11.775 63.913,11.775 64.963,12.825 64.963,13.019 65.743,13.799 65.743,30.306 68.3,32.863 68.3,33.376 68.15,33.526 v1(68.15,33.6)
  Layer 2 w0.25: v1(68.069,39.872) 68.069,39.832 68.15,39.751 v1(68.15,33.6)
  Bottom Layer w0.125: X1.41@45.05,6.825 45.075,6.85 45.075,10.575 v1(45.1,10.6)
LCD_VGL: C61.2 R27.1 VD4.2 X1.42 | length 46.8
  Top Layer w0.3: C61.2@74.425,25.05 74.435,25.06 74.435,25.814 v1(74.444,25.824) 74.447,25.827 74.447,26.422 VD4.2@74.45,26.425 74.462,26.412 75.463,26.412 R27.1@75.475,26.4
  Layer 2 w0.125: v1(44.55,7.938) 44.562,7.925 66.658,7.925 72.054,13.321 72.054,19.262 74.444,21.652 v1(74.444,25.824)
  Bottom Layer w0.125: X1.42@44.55,6.825 v1(44.55,7.938)
LCD_VSYNC: DD1.U19 R26.2 | length 22.3
  Top Layer w0.125: R26.2@60.575,12.5 v1(60.575,13.1)
  Top Layer w0.25: DD1.U19@54.4,31.2 v1(54.8,30.8)
  Layer 1 w0.125: v1(54.8,30.8) 54.8,30.48 55.493,29.788 55.843,29.788 56.188,29.443 56.188,27.359 55.204,26.375 55.204,18.696 60.538,13.362 60.538,13.137 v1(60.575,13.1)
MCU_3V3: C113.2 C118.1 C119.1 DD4.5 DD4.16 L12.1 R97.1 R103.1 R105.2 R106.2 | length 110.8
  Top Layer w0.2: v1(25.85,14.075) v1(28.275,14.075) ; v1@27.038,21.969 31.431,21.969 DD4.16@31.45,21.95 31.462,21.962 32.938,21.962 C119.1@32.95,21.975 ; v1@70.5,10.75 70.525,10.775 R103.1@71.2,10.775
  Top Layer w0.25: R97.1@82.475,18.05 82.984,18.05 83.109,18.175 v1(83.15,18.175)
  Top Layer w0.3: C118.1@24.025,22.15 24.375,22.15 24.575,21.95 DD4.5@25.75,21.95 v1@27.025,21.95
  Layer 2 w0.2: v1(28.275,14.075) v1(41.225,14.075)
  Layer 2 w0.25: v1(78.05,23.565) 78.05,20.825 80.7,18.175 v1(83.15,18.175)
  Layer 2 w0.5: v1(25.85,14.075) 25.85,11.156 29.856,7.15 66.877,7.15 v1(70.487,10.76) 72.691,12.964 72.691,18.806 v1(77.45,23.565) ; v1@25.863,14.088 25.863,20.794 v1(27.024,21.956)
  Bottom Layer w0.2: v1(28.275,14.075) 28.3,14.05 R105.2@28.3,13.425 ; R106.2@41.2,13.45 41.213,13.463 41.213,14.063 v1(41.225,14.075)
  other v1: 77.45,24.325 78.05,24.325
MCU_GP0: DD1.A14 DD4.8 | length 71.8
  Top Layer w0.125: DD4.8@25.75,20 v1(26.728,20) ; v1(49.688,52.85) 49.714,52.85 50.525,52.039 50.525,47.476 50.975,47.026 50.975,46.1 50.4,45.525 DD1.A14@50.4,44
  Layer 1 w0.125: v1(26.728,20) 24.486,20 23.1,21.386 23.1,49.379 27.746,54.025 41.801,54.025 42.976,52.85 v1(49.688,52.85)
MCU_GP1: DD1.A15 DD4.9 | length 73.1
  Top Layer w0.125: DD4.9@25.75,19.35 v1(26.728,19.35) ; v1(49.882,53.35) 49.882,53.276 50.05,53.107 50.05,52.832 50.75,52.132 50.75,47.569 51.2,47.119 DD1.A15@51.2,44
  Layer 1 w0.125: v1(26.728,19.35) 24.818,19.35 22.875,21.293 22.875,49.473 27.653,54.25 41.894,54.25 42.794,53.35 v1(49.882,53.35)
MIC_N: XP8.1 XS4.10 | length 26
  Top Layer w0.125: v1@93.425,47.25 XS4.10@95.05,47.25
  Layer 2 w0.25: v1(93.423,47.265) 94.238,46.45 94.238,25.714 XP8.1@95.977,23.975
MIC_P: XP8.2 XS4.11 | length 25.1
  Top Layer w0.125: v1@96.425,47.75 XS4.11@98.05,47.75
  Layer 2 w0.25: XP8.2@95.977,25.975 98.225,28.223 98.225,45.963 v1(96.423,47.765)
MIO2: DD1.B8 DD3.5 R86.1 | length 15.1
  Top Layer w0.125: DD1.B8@45.6,43.2 46.012,43.612 46.012,45.262 46.427,45.677 47.727,45.677 48.836,46.786 49.315,46.786 50.3,47.771 50.3,51.475 50.025,51.75 49.385,51.75 DD3.5@49.38,51.755 49.38,52.419 49.325,52.474 49.325,52.975 48.875,53.425 R86.1@47.95,53.425
MIO3: DD1.D6 DD3.2 R87.1 | length 21.1
  Top Layer w0.125: v1(56.15,49.2) 58.375,49.2 R87.1@58.4,49.225
  Top Layer w0.25: DD1.D6@44,41.6 v1(44.4,41.2)
  Layer 1 w0.125: v1(44.4,41.2) 44.415,41.215 44.415,41.483 44.8,41.867 44.8,42.963 44.425,43.337 44.425,44.85 46.539,46.964 49.877,46.964 50.477,47.563 55.844,47.563 56.15,47.869 v1(56.15,49.2)
MIO4: DD1.B7 DD3.3 R88.1 | length 19.9
  Top Layer w0.125: DD3.3@57.12,50.485 57.155,50.45 58.375,50.45 R88.1@58.4,50.475
  Top Layer w0.25: DD1.B7@44.8,43.2 v1(45.2,43.6)
  Layer 1 w0.125: v1(45.2,43.6) 45.2,44.989 46.725,46.514 50.064,46.514 50.663,47.113 57.342,47.113 57.925,47.696 v1(57.925,50.45)
MIO5: DD1.A6 DD3.7 R85.1 | length 24.2
  Top Layer w0.125: DD1.A6@44,44 44.017,44.017 44.017,44.385 45.533,45.902 47.631,45.902 48.612,46.883 48.612,49.128 48.685,49.201 49.366,49.201 DD3.7@49.38,49.215 49.38,49.795 v1(49.375,49.8) ; v1(54.725,58.825) 55.35,59.45 R85.1@55.35,61.875
  Layer 2 w0.125: v1(49.375,49.8) 49.325,49.85 49.325,53.425 v1(54.725,58.825)
MIO6: DD1.A5 DD3.6 R89.1 | length 13.4
  Top Layer w0.125: DD1.A5@43.2,44 43.213,44.013 43.213,44.412 43.513,44.713 44.026,44.713 45.44,46.127 47.538,46.127 48.387,46.976 48.387,50.48 ; R89.1@47.95,52.55 R89.1@47.95,52.6 ; R89.1@48.05,52.575 48.387,52.238 48.387,50.48 ; DD3.6@49.38,50.485 48.392,50.485 48.387,50.48
NetC1_1: C1.1 DA1.8 | length 1.2
  Top Layer w0.3: DA1.8@67.275,48.8 C1.1@67.275,50.025
NetC1_2: C1.2 DA1.2 L1.2 | length 8.6
  Top Layer w0.3: C1.2@67.275,50.925 65.7,50.925 65.36,50.585 L1.2@65.36,49.45 65.36,48.24 65.7,47.9 67.5,47.9 67.925,47.475 DA1.2@67.925,46.2
NetC3_2: C3.2 DA1.5 | length 1.2
  Top Layer w0.3: DA1.5@69.225,48.8 69.225,48.825 69.3,48.9 C3.2@70.4,48.9
NetC6_1: C6.1 DA2.8 | length 1.2
  Top Layer w0.4: DA2.8@85,39.975 C6.1@85,41.2
NetC6_2: C6.2 DA2.2 L2.2 | length 8.4
  Top Layer w0.4: C6.2@85,42.1 83.375,42.1 83.085,41.81 83.375,41.52 83.375,39.017 83.609,38.783 85.092,38.783 85.65,38.225 DA2.2@85.65,37.375
NetC8_2: C8.2 DA2.5 | length 1.3
  Top Layer w0.2: DA2.5@86.95,39.975 88,39.975 88.125,40.1 C8.2@88.175,40.1
NetC11_1: C11.1 DA3.8 | length 1.2
  Top Layer w0.4: C11.1@71.35,43.325 71.35,43.375 71.5,43.525 72.45,43.525 DA3.8@72.475,43.55
NetC11_2: C11.2 DA3.2 L3.2 | length 8.8
  Top Layer w0.4: C11.2@70.45,43.325 70.45,42.475 70.85,42.075 71.775,42.075 72.065,41.785 L3.2@72.065,41.302 ; L3.2@72.065,40.575 L3.2@72.065,41.302 ; DA3.2@75.075,44.2 75.05,44.175 74.25,44.175 73.625,43.55 73.625,42.862 72.821,42.058 72.355,42.058 72.065,41.768 L3.2@72.065,41.302
NetC12_2: C12.2 DA1.7 DA2.7 DA3.7 R1.2 R7.2 | length 29.8
  Top Layer w0.2: DA1.7@67.925,48.8 67.929,48.796 67.929,48.096 68.209,47.816 v1@68.515,47.816 ; v1(71.35,44.175) 71.375,44.2 DA3.7@72.475,44.2 ; DA2.7@85.65,39.975 85.65,41.375 v1@85.85,41.575
  Top Layer w0.3: R7.2@67.025,51.85 67.037,51.862 68.037,51.862 C12.2@68.05,51.875 ; DA1.7@67.925,48.8 67.925,51.8 68,51.875 C12.2@68.05,51.875 ; R1.2@68.95,51.875 C12.2@68.05,51.875
  Layer 1 w0.2: v1(71.35,44.175) 73.945,41.58 v1(85.852,41.58)
  Layer 2 w0.2: v1(68.525,47.825) 68.579,47.825 68.675,47.729 68.736,47.729 71.35,45.116 v1(71.35,44.175)
NetC14_2: C14.2 DA3.5 | length 1.3
  Top Layer w0.4: C14.2@72.35,46.7 72.35,45.525 72.375,45.5 DA3.5@72.475,45.5
NetC17_1: C17.1 DA4.7 | length 1.5
  Top Layer w0.25: DA4.7@41.495,21.929 41.779,21.929 41.925,22.075 41.925,22.325 41.795,22.455 41.795,22.905 C17.1@41.7,23